# Altium PCB B222.PcbDoc
Units mm, origin at the board's own origin, x right, y up, seen from the top; angles counter-clockwise.
Board outline 40 x 22 mm, 4 copper layers (Top Copper, Signal Layer 1, Signal Layer 2, Bottom Copper), stack 1.57 mm thick; 17 components, 21 nets, 108 pads, 302 vias.
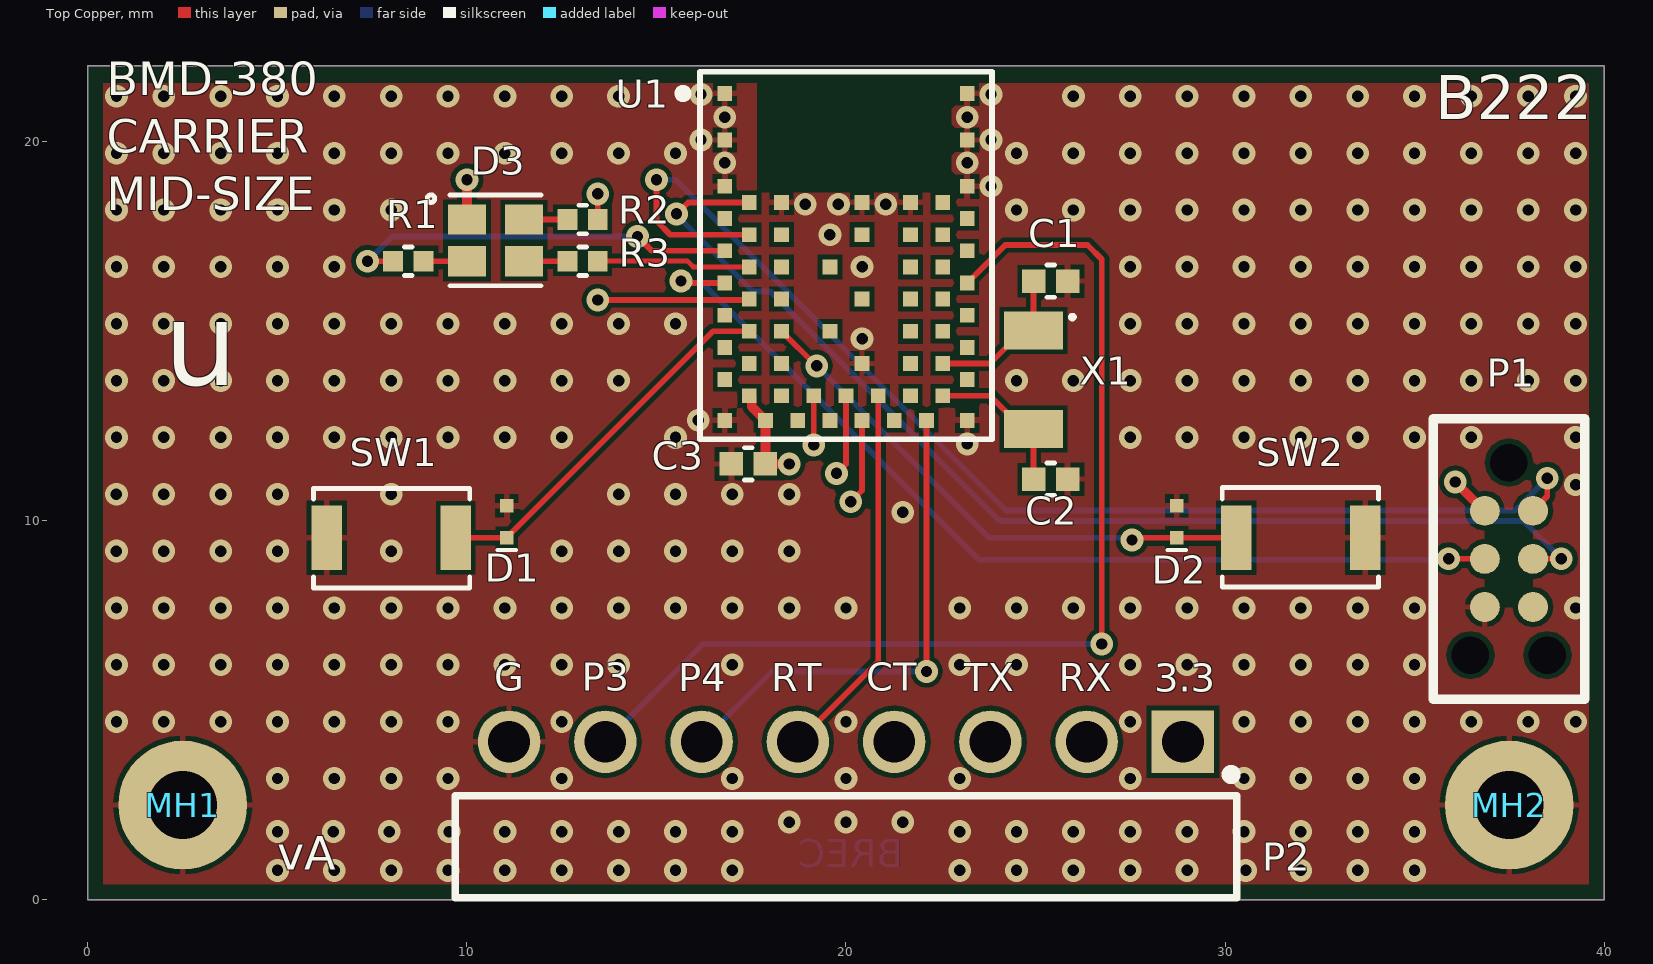
[diagram p0: Top Copper view]
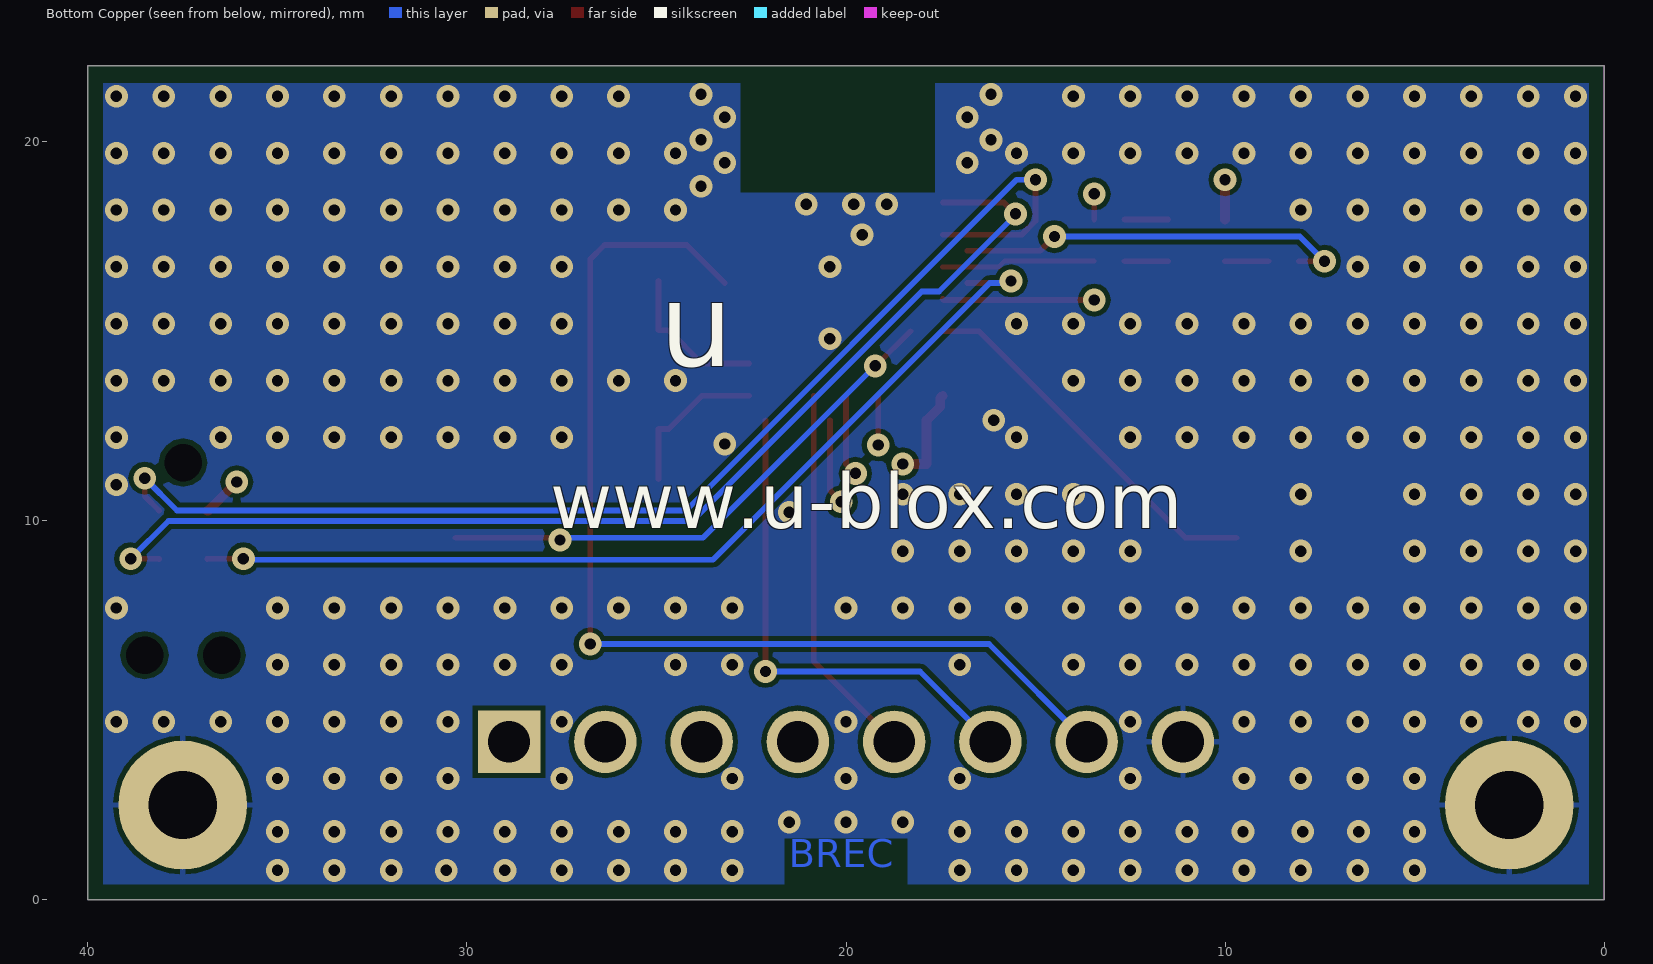
[diagram p1: Bottom Copper view, seen from below]
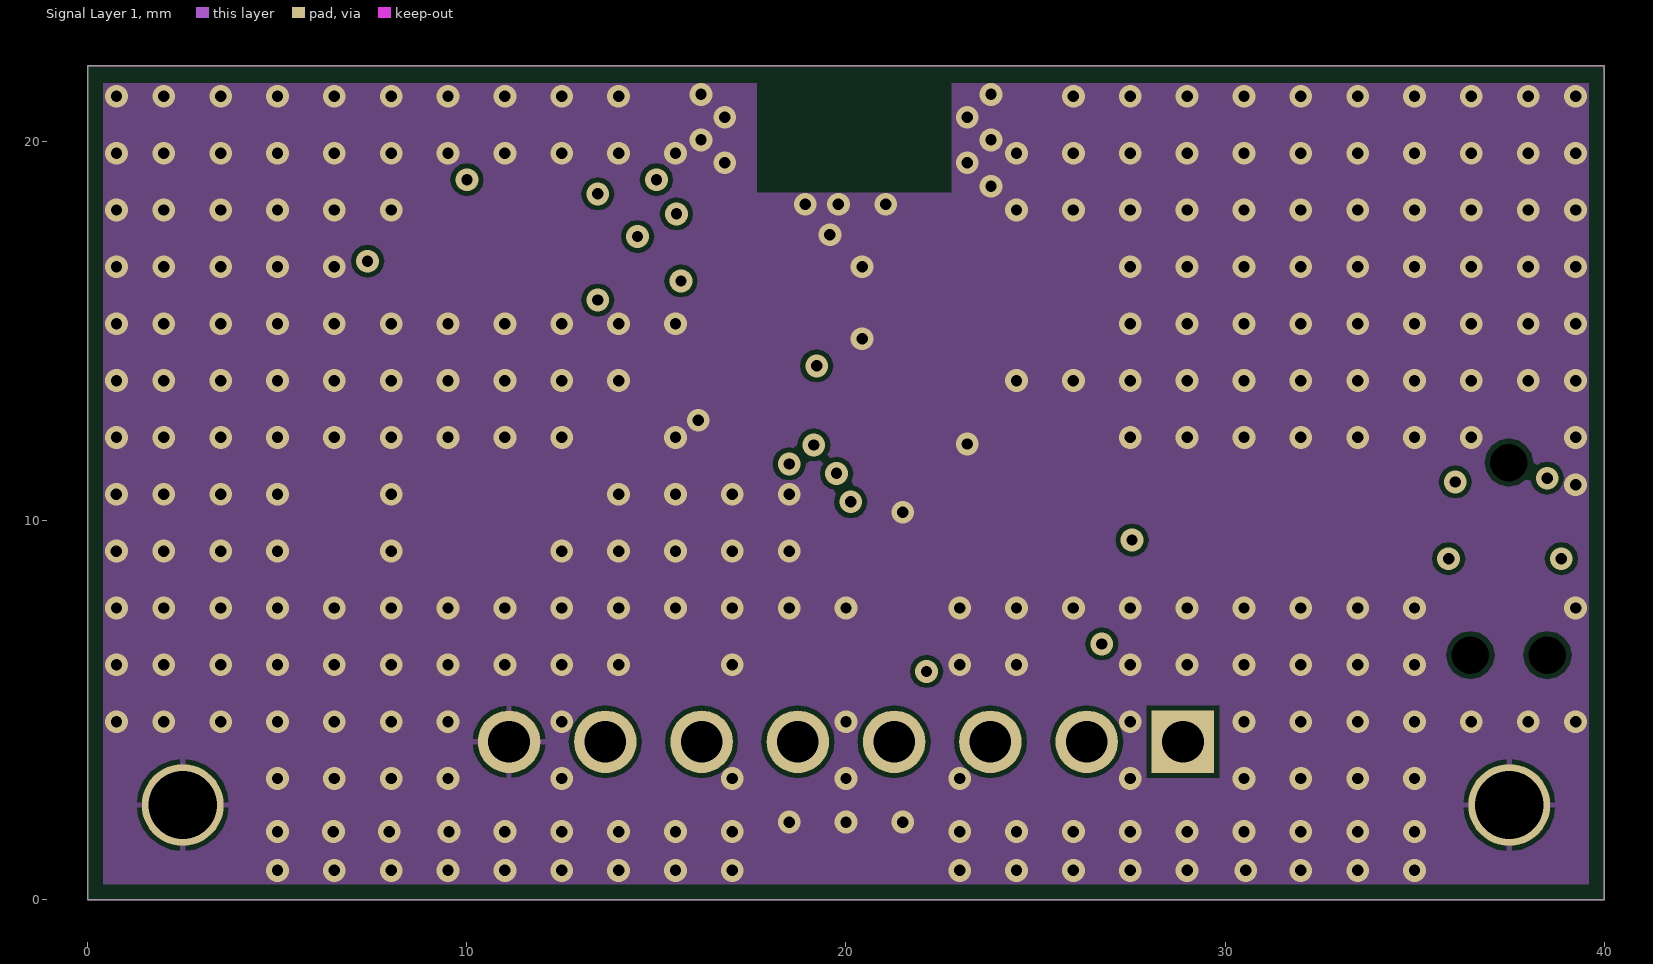
[diagram p2: Signal Layer 1]
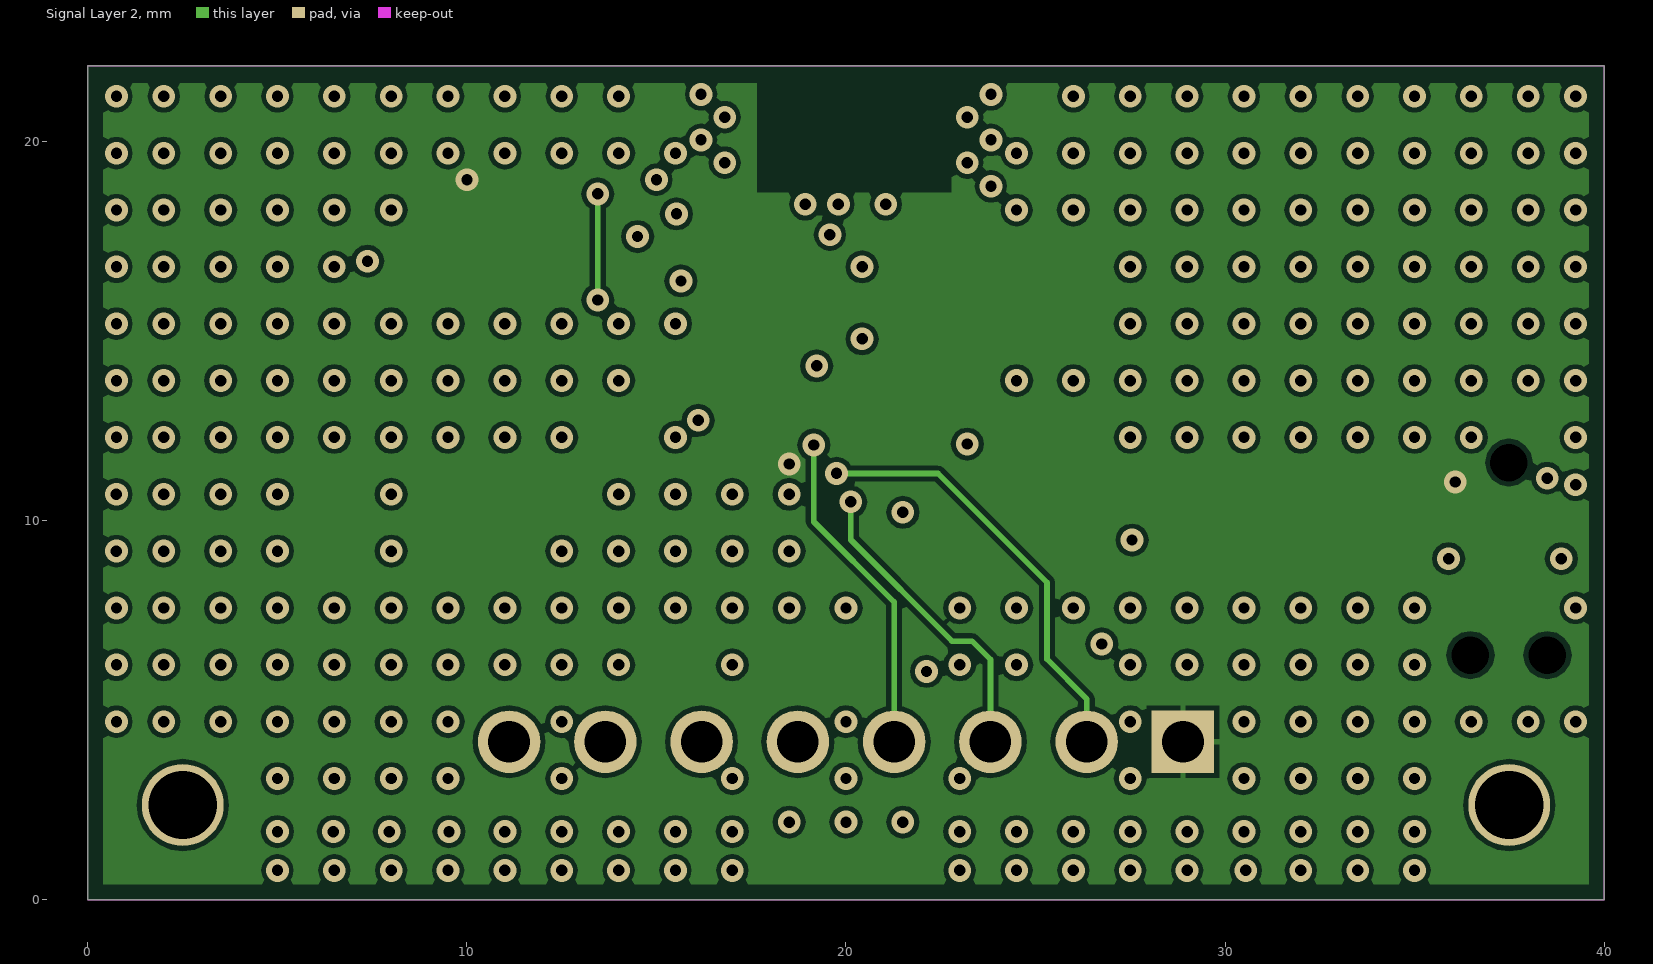
[diagram p3: Signal Layer 2]

## Layer stack, top to bottom
Top Mask: solder mask 0.015, Solder Resist, Dk 3.8
Top Copper: signal copper 0.035
Dielectric 1: prepreg 0.1, 2313, Dk 4.05
Signal Layer 1: signal copper 0.0175
Core: core 1.265, FR-4, Dk 4.5
Signal Layer 2: signal copper 0.0175
Dielectric 2: prepreg 0.1, 2313, Dk 4.05
Bottom Copper: signal copper 0.035
Bottom Mask: solder mask 0.015, Solder Resist, Dk 3.8

## Board outline
0,22 40,22 40,0 0,0

## Design rules (kind name [scope] priority, off if disabled: settings)
BoardOutlineClearance [All] p1: gap=0.4 ignorepadtopadclearanceinfootprint=FALSE
Clearance "Stitching GND" [IsStitchingVia and InNet('GND') vs (IsVia and (Not IsStitchingVia)) Or IsPad] p1: gap=0.127 ignorepadtopadclearanceinfootprint=TRUE
Clearance Clearance_Poly [InPolygon vs OnLayer('Keep-Out Layer') OR (OnLayer('Multi-Layer') AND IsPad  AND Not(PadIsPlated))] p2: gap=0.127 ignorepadtopadclearanceinfootprint=TRUE
Clearance [All] p3: gap=0.127 ignorepadtopadclearanceinfootprint=FALSE except(0: Arc-Text Arc-Hole Track-Text Track-Hole SMDPad-Text SMDPad-Hole THPad-Text THPad-Hole Via-Text Via-Hole Fill-Text Fill-Hole Poly-Text Poly-Hole Region-Text Region-Hole Text-Text Text-Hole)
ComponentClearance [All] p1: gap=0.127 collisioncheckmode=3 verticalgap=0.254 showdistances=FALSE
DiffPairsRouting .14 [All] p1: maxlimit=0.254 minlimit=0.1 mostfreqgap=0.254 toplayer_maxgap=0.1 toplayer_prefgap=0.1 toplayer_minwidth=0.1 toplayer_maxwidth=0.1 toplayer_prefwidth=0.1 midlayer1_mingap=0.254 midlayer1_minwidth=0.381 midlayer1_maxwidth=0.381 midlayer1_prefwidth=0.381 midlayer2_mingap=0.254 midlayer2_minwidth=0.381 midlayer2_maxwidth=0.381 midlayer2_prefwidth=0.381 bottomlayer_maxgap=0.1 bottomlayer_prefgap=0.1 bottomlayer_minwidth=0.1 bottomlayer_maxwidth=0.1 bottomlayer_prefwidth=0.1 maxuncoupledlength=12.7
Height [All] p1: minheight=0 maxheight=25.4 prefheight=2.54
HoleSize [All] p1: absolutevalues=TRUE maxlimit=2540 minlimit=0.127 maxpercent=80.000 minpercent=20.000
HoleToHoleClearance [All] p1: gap=0.152 allowstackedmicrovias=TRUE
MinimumSolderMaskSliver [All] p1: minsoldermaskwidth=0.025
PlaneClearance [InPoly] p1: clearance=0.254
PlaneConnect [All] p1: pad.planeconnectstyle=Relief pad.reliefexpansion=0.508 pad.reliefentries=4 pad.reliefconductorwidth=0.254 pad.reliefairgap=0.254 via.planeconnectstyle=Direct via.reliefexpansion=0.508 via.reliefentries=4 via.reliefconductorwidth=0.254 via.reliefairgap=0.254
PolygonConnect ThermalVias [IsVia] p1: connectstyle=Direct reliefconductorwidth=0.254 reliefentries=4 polygonreliefangle="90 Angle" airgapwidth=0.254
PolygonConnect "PolygonConnect - Power" [InNetClass('')] p2: connectstyle=Relief reliefconductorwidth=0.254 reliefentries=4 polygonreliefangle="90 Angle" airgapwidth=0.127
PolygonConnect PolygonConnect-BGA [InComponentClass('')] p3: connectstyle=Relief reliefconductorwidth=0.152 reliefentries=4 polygonreliefangle="45 Angle" airgapwidth=0.152
PolygonConnect PolygonConnect-General [All] p4: connectstyle=Relief reliefconductorwidth=0.152 reliefentries=4 polygonreliefangle="90 Angle" airgapwidth=0.127
RoutingVias [All] p1: holewidth=0.3 width=0.6 viastyle="Through Hole" minholewidth=0.2 minwidth=0.5 maxholewidth=7 maxwidth=1
SMDEntry [All] p1 off: side=TRUE corner=TRUE anyangle=TRUE
SilkToBoardRegionClearance [All] p1 off:
SilkToSilkClearance [All] p1 off: silktosilkclearance=0.025
SilkToSolderMaskClearance [IsPad] p1 off: minsilkscreentomaskgap=0 clearancetoexposedcopper=TRUE
SolderMaskExpansion SolderMaskExpansion_via [IsVia] p1: expansion=-0.254 istentingtop=TRUE
SolderMaskExpansion [All] p2: expansion=0.05 istentingtop=FALSE
UnRoutedNet [All] p1: checkbadconnections=TRUE
ViasUnderSMD [All] p1: allowed=FALSE
Width [All] p1: maxlimit=2.54 minlimit=0.127 preferedwidth=0.152 toplayer_maxwidth=0.254 toplayer_prefwidth=0.152 bottomlayer_maxwidth=0.254 bottomlayer_prefwidth=0.152 minimp=50.000000 maximp=50.000000 favimp=50.000000
Width Width_1 [All] p2: maxlimit=0.254 minlimit=0.254 preferedwidth=0.254
18 further rules are at their usual default settings.

## Components (designator, comment, footprint, x,y, rotation, side; value= is the part's Value field where it differs from the comment)
C1 "UBXH01-000411410P" "Cap 0402" 25.4,16.325 r0 top value=10P
C2 "UBXH01-000411410P" "Cap 0402" 25.4,11.1 r0 top value=10P
C3 "UBXH01-2021002100N" "Cap 0402" 17.425,11.5 r180 top value=100N
D1 "110-00019" SOD-923 11.05,9.975 r90 top
D2 "110-00019" SOD-923 28.725,9.975 r90 top
D3 "115-00011" 4-PLCC 10.75,17.4 r180 top
MH1 "MH_M1.5DNP" MH_M1.5 2.5,2.5 r0 top
MH2 "MH_M1.5DNP" MH_M1.5 37.5,2.5 r0 top
P1 "TC2030-IDC-NLDNP" TC2030-IDC-NL 37.49,11.535 r270 top
P2 "61300811021" 61300811021 20,1.4 r0 top
R1 "180-00031499R" "RES 0402 HD" 8.45,16.85 r0 top value=499R
R2 "180-00098220R" "RES 0402 HD" 13.05,17.95 r180 top value=220R
R3 "180-00098220R" "RES 0402 HD" 13.05,16.85 r180 top value=220R
SW1 "135-00007" B3U-1000P 8,9.55 r180 top
SW2 "135-00007" B3U-1000P 32,9.55 r0 top
U1 "=Value" BMD_LGA63S_950X750X150_CHIP 20,17 r0 top
X1 "100-00005" XTAL_3215 24.95,13.725 r270 top

## Footprints (in the part's own frame and the unit in brackets; to place one, negate y for a bottom-side part, rotate by r counter-clockwise, add the part's x,y. Pads: shape width x height; smd on the part's side, far side on the other; paste and mask are expansions set on the pad)
4-PLCC [mm] "4 Pin Plastic Leaded Chip Carrier, 2mm x 2mm"
  rect 1x0.8 smd: 1(0.75,-0.55) 2(-0.75,-0.55) 3(-0.75,0.55) 4(0.75,0.55)
  silkscreen extent -1.2,-1.2 1.8,1.2, body extent -1.05,-1.05 1.05,1.05, height 1.01
61300811021 [mm]
  rect 1.65x1.65 hole 1.1: 1(8.89,2.77)
  round 1.65 hole 1.1: 2(6.35,2.77) 3(3.81,2.77) 4(1.27,2.77) 5(-1.27,2.77) 6(-3.81,2.77) 7(-6.35,2.77) 8(-8.89,2.77)
  silkscreen extent -10.31,-1.35 10.31,2.03, body extent -10.16,-7.27 10.16,3.09, height 2.58
B3U-1000P [mm] "Button Tactile, SMT 4mm x 2.5mm, height 1.2mm"
  rect 0.8x1.7 smd: 1(-1.7,0) 2(1.7,0)
  silkscreen extent -2.07,-1.3 2.05,1.33, body extent -2,-1.25 2,1.25, height 1.6
BMD_LGA63S_950X750X150_CHIP [mm] "WLCSP, 63pin, 0.85mm Pitch, 9.5mm x 7.5mm"
  rect 0.39x0.39 smd: 1(-3.2,4.275) 2(-3.2,3.05) 3(-3.2,1.825) 4(-2.55,1.4) 5(-1.7,1.4) 6(-3.2,0.975) 7(-2.55,0.55) 8(-1.7,0.55) 9(-3.2,0.125) 10(-2.55,-0.3) 11(-1.7,-0.3) 12(-3.2,-0.725) 13(-2.55,-1.15) 14(-1.7,-1.15) 15(-3.2,-1.575) 16(-2.55,-2) 17(-1.7,-2) 18(-3.2,-2.425) 19(-2.55,-2.85) 20(-1.7,-2.85) 21(-3.2,-3.275) 22(-2.55,-3.7) 23(-3.2,-4.35) 24(-2.125,-4.35) 25(-1.7,-3.7) 26(-1.275,-4.35) 27(-0.85,-3.7) 28(-0.425,-4.35) 29(0,-3.7) 30(0.425,-4.35) 31(0.85,-3.7) 32(1.275,-4.35) 33(1.7,-3.7) 34(2.125,-4.35) 35(3.2,-4.35) 36(2.55,-3.7) 37(3.2,-3.275) 38(2.55,-2.85) 39(1.7,-2.85) 40(3.2,-2.425) 41(2.55,-2) 42(1.7,-2) 43(3.2,-1.575) 44(2.55,-1.15) 45(1.7,-1.15) 46(3.2,-0.725) 47(2.55,-0.3) 48(1.7,-0.3) 49(3.2,0.125) 50(2.55,0.55) 51(1.7,0.55) 52(3.2,0.975) 53(2.55,1.4) 54(1.7,1.4) 55(3.2,1.825) 56(3.2,3.05) 57(3.2,4.275) 58(0.425,1.4) 59(0.425,0.55) 60(-0.425,-0.3) 61(0.425,-1.15) 62(-0.425,-2) 63(0.425,-2.85)
  Multi-Layer pour cut-out: -3.75,4.75 -3.75,4.55 -2.36,4.55 -2.36,1.65 2.79,1.65 2.79,4.55 3.75,4.55 3.75,4.75
  silkscreen extent -4.4,-4.85 3.85,4.85, body extent -3.75,-4.75 3.75,4.75, height 1.53
"Cap 0402" [mm] "Chip Capacitor, 2-Leads, Body 1.00x0.50mm, IPC Medium Density"
  rect 0.62x0.62 smd: 1(-0.45,0) 2(0.45,0)
  silkscreen extent -0.1,-0.43 0.1,0.43, body extent -0.55,-0.3 0.55,0.3, height 0.6
MH_M1.5 [mm] "Mounting Hole M1.5 Metric, 3.4mm diameter pad"
  round 3.4 / inner round 2.159 / far side round 3.4 hole 1.8: 1(0,0)
"RES 0402 HD" [mm] "Chip Resistor, 2-Leads, Body 1.05x0.54mm, IPC High Density"
  rect 0.52x0.55 smd: 1(-0.4,0) 2(0.4,0)
  silkscreen extent -0.1,-0.38 0.1,0.38, body extent -0.55,-0.3 0.55,0.3, height 0.4
SOD-923 [mm] "SOD-923, 2-Leads, Body 1.25x2.50mm, IPC High Density,"
  rect 0.36x0.35 smd mask+0.05: 1(-0.42,0) 2(0.42,0)
  silkscreen extent -0.75,-0.25 -0.75,0.25, body extent -0.4,-0.3 0.4,0.3, height 0.4
TC2030-IDC-NL [mm] "Tag-Connect 6-Pin No Legs"
  round 0.9 hole 0.995 unplated: 0(0,0) 0(5.08,-1.016) 0(5.08,1.016)
  round 0.79 smd paste-0.39: 1(1.27,-0.635) 2(1.27,0.635) 3(2.54,-0.635) 4(2.54,0.635) 5(3.81,-0.635) 6(3.81,0.635)
  silkscreen extent -1.16,-2 6.24,2
XTAL_3215 [mm] "XTAL, 2-Leads, Body 1.50x3.20mm"
  rect 1x1.55 smd: 1(-1.3,0) 2(1.3,0)
  silkscreen extent -1.7,0.98 -1.6,1.07, body extent -1.65,-0.8 1.65,0.8, height 0.9

## Part data
C1 C2: library part UBXH01-0004114, "CAP CER COG 0402", Manufacturer="Murata Manufacturing Company, Ltd.", Manufacturer 2=None, Manufacturer P/N=GRM1555C1H100CZ01, Max Voltage=25.0V, Tolerance=5%, Automotive=None, Critical=None, Editor=martin.frauchiger, Env=ROHS, Manufacturer 3=None, Manufacturer P/N 2=None, Manufacturer P/N 3=None, Max Current=None, Max Operating Temp=None, Max Power=None, Mfg P/N Datasheet=None, Mfg P/N Datasheet 2=None, Mfg P/N Datasheet 3=None, Mfg P/N Released=Yes, Mfg P/N Released 2=None, Mfg P/N Released 3=None, Mfg P/N Split=0, Mfg P/N Split 2=None, Mfg P/N Split 3=None, Mfg P/N Status=Obsolete, Mfg P/N Status 2=None, Mfg P/N Status 3=None, Min Operating Temp=None, Part Number=UBXH01-0004114, Part Type=Capacitor, Perferred=PREF, Permitted Use="Volume Products", RefDes=C, Release Data="2005-09-01 15:36:53", Released by=martin.frauchiger, Single Source=None, Size=0x0y, UBX Wiki=https://wiki.u-blox.com/bin/view/Operations/PartDetails?index=5225
C3: library part UBXH01-2021002, "CAP CER X5R 0402", Manufacturer="Samsung Electro-Mechanics", Manufacturer 2=None, Manufacturer P/N=CL05A104KP5NNN, Max Voltage=10.0V, Tolerance=10%, Automotive=None, Critical=None, Editor=roland.rust, Env=GREEN, Manufacturer 3=None, Manufacturer P/N 2=None, Manufacturer P/N 3=None, Max Current=None, Max Operating Temp=None, Max Power=None, Mfg P/N Datasheet=https://wiki.u-blox.com/bin/view/Generic/Docs/DocumentSummary?index=28113, Mfg P/N Datasheet 2=None, Mfg P/N Datasheet 3=None, Mfg P/N Released=Yes, Mfg P/N Released 2=None, Mfg P/N Released 3=None, Mfg P/N Split=0, Mfg P/N Split 2=None, Mfg P/N Split 3=None, Mfg P/N Status=Active, Mfg P/N Status 2=None, Mfg P/N Status 3=None, Min Operating Temp=None, Part Number=UBXH01-2021002, Part Type=Capacitor, Perferred=PREF, Permitted Use="Volume Products", RefDes=C, Release Data="2005-07-22 13:59:44", Released by=roland.rust, Single Source=None, Size=0x0y, UBX Wiki=https://wiki.u-blox.com/bin/view/Operations/PartDetails?index=5759
D1 D2: "Diode, ESD9B, 3.3V, ST5G, SOD-923", Manufacturer="ON Semiconductor", Manufacturer P/N=ESD9B3.3ST5G, MFG Package=SOD-923, Package Type=SOD, Part Name="Diode TVS 3.3V SOD-923", Voltage=3.3V, Arena Link=https://app.bom.com/a/4M5DJQ9Q9SR7DV4H?v=spec.summary, Body Size="0.8mm x 0.6mm", Component Mounting Type=SMT, Diode Type=TVS, Height=0.4mm, Item_Phase=Production, Part Number=110-00019, Part_Type=Diode, Pins=2, Revision=0A, Supplier 1=Arrow, Supplier Part Number 1=ESD9B3.3ST5G, Use in new designs=Yes
D3: "LED, RGB Diffused SMT, PLCC4 4 Pin", Color=RGB, Current="20mA Red, 10mA Green, 10mA, Blue", Manufacturer="Cree, Inc.", Manufacturer P/N=CLMVB-FKA-CFHEHLCBB7a363, MFG Package=PLCC4, Package Type=Custom, Part Name="LED RGB SMT 2mm x 2mm", Supplier Part Number 1=941-CLMVBFKACFHEHLCB, Voltage=5V, Arena Link=https://app.bom.com/a/UCV39GZGZIHY581D?v=spec.summary, Body Size="2.0mm x 2.0mm", Component Mounting Type=SMT, Height=1mm, Item_Phase=Production, Mounting Type=Vertical, Number of Circuits=3, Part Number=115-00011, Part_Type=LED, Pins=4, Revision=0A, Supplier 1=Mouser, Use in new designs=Yes, Vf="2V Red, 3V Green, 3V Blue"
MH1 MH2: library part MH_M1.5, "1.5M screw mounting hole, plated", Added By="Jeremy D", Added Date=7/9/2015, DNP=DNP, Height=0mm, Part Number=MH_M1.5, Size="3.4mm x 3.4mm", Type="Mounting Hole"
P1: library part TC2030-IDC-NL, "CON PADS FOR CBL PLUG-OF-NAILS 6-PIN NO LEGS", Manufacturer="TAG Connect", Added By="Paul B", Added Date=4/22/2015, DNP=DNP, Height=0, Manufacturer P/N=TC2030-IDC-NL, Part Number=TC2030-IDC-NL, Size="6.731mm x 12.446mm"
P2: library part CMP-1502-01075-1, "THT Angled Pin Header WR-PHD, Pitch 2.54 mm, Single Row, 8 pins", Contact Resistance=20mOhm, Manufacturer="Wurth Electronics", Operating Temperature=-40to105degC, Rated Current=3A, Withstanding Voltage=500VAC, Working Voltage=250VAC, Datasheet URL=https://katalog.we-online.de/em/datasheet/6130xx11021.pdf, Gender=Male, Manufacturer Part Number=61300811021, Manufacturer URL=http://www.we-online.de, Mounting Technology=THT, Orientation=Angled, Package Reference=61300811021, Packaging=Bag, Part Number=61300811021, Pin Number=8, Pitch=2.54mm, Publisher=WurthElektronik, Row Number=Single
R1: library part 180-00031, "Resistor, 499ohm, 1%, 1/16W, 0402", Manufacturer="Rohm Semiconductor", Manufacturer 2="Samsung Electro-Mechanics America, Inc", Manufacturer P/N=MCR01MRTF4990, Manufacturer P/N 2=RC1005F4990CS, Part Name="RES SMD 499 OHM 1% 1/16W 0402", Power=1/16W, Supplier Part Number 1=RHM499CDCT-ND, Tolerance="+/- 1%", Alternate Footprint Ref="RES 0402", Arena Link=https://app.bom.com/a/Q8RZ5CVCVEDU1SS5?v=spec.summary, Component Mounting Type=SMT, Height=0.4mm, Item_Phase=Production, Part Number=180-00031, Part_Type=Resistor, Pins=2, Revision=0D, Size=0402, Supplier 1=Digi-Key, Supplier 2=Digi-Key, Supplier Part Number 2=1276-3992-1-ND, Use in new designs=Yes
R2 R3: library part 180-00098, "Resistor, 220ohm, 5%, 1/16W, 0402.", Manufacturer="Panasonic Electronic Components", Manufacturer 2="Samsung Electro-Mechanics America, Inc", Manufacturer P/N=ERJ-2GEJ221X, Manufacturer P/N 2=RC1005J221CS, Part Name="RES SMD 220 OHM 5% 1/16W 0402", Power=1/16W, Supplier Part Number 1=P220JCT-ND, Tolerance="+/- 5%", Alternate Footprint Ref="RES 0402", Arena Link=https://app.bom.com/a/8Q9HNUDUDWVBJC30?v=spec.summary, Component Mounting Type=SMT, Height=0.4mm, Item_Phase=Production, Part Number=180-00098, Part_Type=Resistor, Pins=2, Revision=0C, Size=0402, Supplier 1=Digi-Key, Supplier 2=Digi-Key, Supplier Part Number 2=1276-4360-1-ND, Use in new designs=Yes
SW1 SW2: "Button, Momentary SPST-NO, 0.05A, 12V, 3mm x 2.5mm", Current=50mA, Manufacturer="Omron Electronics Inc-EMC Div", Manufacturer P/N=B3U-1000P, Part Name="SWITCH TACTILE SPST-NO 0.05A 12V", Supplier Part Number 1=SW1020CT-ND, Voltage=12VDC, Arena Link=https://app.bom.com/a/TBU28FYFYHGV5FQ0?v=spec.summary, Body Size="3mm x 2.5mm", Component Mounting Type=SMT, Height=1.2mm, Item_Phase=Production, Part Number=135-00007, Part_Type=Button, Pins=2, Revision=0A, Supplier 1=Digi-Key, Switch/Button Circuit=SPST, Switch/Button Function=Off-Mom, Use in new designs=Yes
U1: library part BMD-380, "u-blox BMD-380 Bluetooth 5 LE, 802.15.4 module", Manufacturer=u-blox, Manufacturer P/N=BMD-380-A-R, Body Size="9.5mm x 7.5mm", Height=1.5mm, Internal Antenna=Yes, Part Number=BMD-380, Protocol="BT 5.1 LE, 802.15.4, 2.4GHz Proprietary"
X1: "XTAL, 2Pin, 32.768kHz, 7pF 20ppm", Frequency=32.768kHz, Frequency Tolerance=20ppm, Manufacturer=Epson, Manufacturer 2="AVX Corporation", Manufacturer P/N="FC-135 32.7680KA-AG3", Manufacturer P/N 2=ST3215SB32768C0HPWBB, MFG Package=2-SMD, Part Name="XTAL 32.768kHz 7pF 20ppm 3215", Supplier Part Number 1=SER4086CT-ND, Arena Link=https://app.bom.com/a/L3MU07Q7Q98O5PC8?v=spec.summary, Body Size="3.2mm x 1.5mm", CL=7pF, Component Mounting Type=SMT, Height=0.9mm, Item_Phase=Production, Part Number=100-00005, Part_Type=Crystal/Oscillator, Pins=2, Revision=0C, Supplier 1=Digi-Key, Supplier 2=Digi-Key, Supplier Part Number 2=1253-1113-1-ND, Use in new designs=Yes

## Via types
v1: diameter 0.6, hole 0.3, Top Copper to Bottom Copper, tented both sides, 302 vias

## Nets (pads, with @x,y where several pads share a name; then routed paths per layer and width w, separated by ;. In a path a pad name is that pad's centre, name@x,y a point inside that pad or via, vN(x,y) a via of type N, cw(c..) or ccw(c..) an arc to the next point about the centre after c; other vN are vias at no path point)
3V3: C3.1 D3.1 P1.1 P2.1 U1.22 U1.24 | length 4.7
  Top Copper w0.254: D3.1 v1(10,19) ; U1.22 17.511,13.239 17.511,13.014 U1.24 C3.1 v1(18.5,11.5) ; v1(36.075,11.025) 36.835,10.265 P1.1
BLUE: R2.1 U1.13 | length 7.5
  Top Copper w0.152: v1(13.45,15.825) 17.425,15.825 U1.13 ; R2.1 v1(13.45,18.625)
  Signal Layer 2 w0.152: v1(13.45,15.825) v1(13.45,18.625)
BUTTON_1: D1.1 SW1.1 U1.16 | length 10
  Top Copper w0.152: SW1.1 9.705,9.555 D1.1 11.05,9.56 16.49,15 U1.16
BUTTON_2: D2.1 SW2.1 U1.17 | length 14.4
  Top Copper w0.152: U1.17 19.205,14.095 19.205,14.054 19.225,14.074 v1(19.225,14.087) ; v1(27.547,9.493) 27.607,9.553 28.723,9.553 D2.1 30.295,9.555 SW2.1
  Bottom Copper w0.152: v1(19.225,14.087) 19.238,14.087 23.775,9.55 27.49,9.55 v1(27.547,9.493)
CTS: P2.4 U1.27 | length 10
  Top Copper w0.152: v1(19.15,12) U1.27
  Signal Layer 2 w0.152: v1(19.15,12) 19.15,9.975 21.27,7.855 P2.4
GND: C1.2 C2.2 C3.2 D1.2 D2.2 MH1.1 MH2.1 P1.5 P2.8 SW1.2 SW2.2 U1.1 U1.2 U1.3 U1.5 U1.23 U1.35 U1.54 U1.55 U1.56 U1.57 U1.58 U1.63
  other v1: 5,0.775 6.5,0.775 8,0.775 9.5,0.775 11,0.775 12.5,0.775 14,0.775 15.5,0.775 17,0.775 23,0.775 24.5,0.775 26,0.775 27.5,0.775 29,0.775 30.55,0.775 32,0.775 33.5,0.775 35,0.775 5,1.8 6.475,1.8 7.95,1.8 9.525,1.8 11,1.8 12.5,1.8 14,1.8 15.5,1.8 17,1.8 23,1.8 24.5,1.8 26,1.8 27.5,1.8 29,1.8 30.5,1.8 32,1.8 33.5,1.8 35,1.8 18.5,2.05 20,2.05 21.5,2.05 5,3.2 6.5,3.2 8,3.2 9.5,3.2 12.5,3.2 17,3.2 20,3.2 23,3.2 27.5,3.2 30.5,3.2 32,3.2 33.5,3.2 35,3.2 0.752,4.7 2,4.7 3.5,4.7 5,4.7 6.5,4.7 8,4.7 9.5,4.7 12.5,4.7 20,4.7 27.5,4.7 30.5,4.7 32,4.7 33.5,4.7 35,4.7 36.5,4.7 38,4.7 39.25,4.7 0.752,6.2 2,6.2 3.5,6.2 5,6.2 6.5,6.2 8,6.2 9.5,6.2 11,6.2 12.5,6.2 14,6.2 17,6.2 23,6.2 24.5,6.2 27.5,6.2 29,6.2 30.5,6.2 32,6.2 33.5,6.2 35,6.2 0.752,7.7 2,7.7 3.5,7.7 5,7.7 6.5,7.7 8,7.7 9.5,7.7 11,7.7 12.5,7.7 14,7.7 15.5,7.7 17,7.7 18.5,7.7 20,7.7 23,7.7 24.5,7.7 26,7.7 27.5,7.7 29,7.7 30.5,7.7 32,7.7 33.5,7.7 35,7.7 39.25,7.7 0.75,9.2 2,9.2 3.5,9.2 5,9.2 8,9.2 12.5,9.2 14,9.2 15.5,9.2 17,9.2 18.5,9.2 21.5,10.225 0.75,10.7 2,10.7 3.5,10.7 5,10.7 8,10.7 14,10.7 15.5,10.7 17,10.7 18.5,10.7 39.25,10.95 23.2,12.025 0.752,12.2 2,12.2 3.5,12.2 5,12.2 6.5,12.2 8,12.2 9.5,12.2 11,12.2 12.5,12.2 15.5,12.2 27.5,12.2 29,12.2 30.5,12.2 32,12.2 33.5,12.2 35,12.2 36.5,12.2 39.25,12.2 16.1,12.65 0.752,13.7 2,13.7 3.5,13.7 5,13.7 6.5,13.7 8,13.7 9.5,13.7 11,13.7 12.5,13.7 14,13.7 24.5,13.7 26,13.7 27.5,13.7 29,13.7 30.5,13.7 32,13.7 33.5,13.7 35,13.7 36.5,13.7 38,13.7 39.25,13.7 20.425,14.8 0.752,15.2 2,15.2 3.5,15.2 5,15.2 6.5,15.2 8,15.2 9.5,15.2 11,15.2 12.5,15.2 14,15.2 15.5,15.2 27.5,15.2 29,15.2 30.5,15.2 32,15.2 33.5,15.2 35,15.2 36.5,15.2 38,15.2 39.25,15.2 0.752,16.7 2,16.7 3.5,16.7 5,16.7 6.5,16.7 20.425,16.7 27.5,16.7 29,16.7 30.5,16.7 32,16.7 33.5,16.7 35,16.7 36.5,16.7 38,16.7 39.25,16.7 19.575,17.55 0.752,18.2 2,18.2 3.5,18.2 5,18.2 6.5,18.2 8,18.2 24.5,18.2 26,18.2 27.5,18.2 29,18.2 30.5,18.2 32,18.2 33.5,18.2 35,18.2 36.5,18.2 38,18.2 39.25,18.2 18.925,18.35 19.8,18.35 21.05,18.35 23.825,18.825 16.8,19.45 23.2,19.45 0.752,19.7 2,19.7 3.5,19.7 5,19.7 6.5,19.7 8,19.7 9.5,19.7 11,19.7 12.5,19.7 14,19.7 15.5,19.7 24.5,19.7 26,19.7 27.5,19.7 29,19.7 30.5,19.7 32,19.7 33.5,19.7 35,19.7 36.5,19.7 38,19.7 39.25,19.7 16.175,20.05 23.825,20.05 16.8,20.65 23.2,20.65 0.752,21.2 2,21.2 3.5,21.2 5,21.2 6.5,21.2 8,21.2 9.5,21.2 11,21.2 12.5,21.2 14,21.2 26,21.2 27.5,21.2 29,21.2 30.5,21.2 32,21.2 33.5,21.2 35,21.2 36.5,21.2 38,21.2 39.25,21.2 16.175,21.25 23.825,21.25
GREEN: R3.1 U1.10 | length 4.1
  Top Copper w0.127: R3.1 13.458,16.858 15.806,16.858 15.965,16.7 U1.10
LFCLK1: C2.1 U1.36 X1.2 | length 4.1
  Top Copper w0.152: U1.36 23.8,13.3 24.675,12.425 X1.2 C2.1
LFCLK2: C1.1 U1.38 X1.1 | length 4.1
  Top Copper w0.152: U1.38 23.8,14.15 24.675,15.025 X1.1 C1.1
NetD3_2: D3.2 R2.2 | length 1.2
  Top Copper w0.152: D3.2 R2.2
NetD3_3: D3.3 R3.2 | length 1.2
  Top Copper w0.152: D3.3 R3.2
NetD3_4: D3.4 R1.2 | length 1.1
  Top Copper w0.152: R1.2 D3.4
nRESET: P1.3 U1.12 | length 25.4
  Top Copper w0.152: v1(15.645,16.328) 15.698,16.275 U1.12 ; v1(35.9,9) 35.902,8.998 36.853,8.998 P1.3
  Bottom Copper w0.152: v1(15.645,16.328) 15.698,16.275 16.207,16.275 18.811,13.671 23.507,8.975 35.875,8.975 v1(35.9,9)
P0.03: P2.7 U1.46 | length 28.4
  Top Copper w0.152: U1.46 24.2,17.275 26.375,17.275 26.75,16.9 v1(26.75,6.75)
  Bottom Copper w0.152: P2.7 16.23,6.75 v1(26.75,6.75)
P0.04: P2.6 U1.34 | length 13.3
  Top Copper w0.152: v1(22.125,6.025) U1.34
  Bottom Copper w0.152: P2.6 18.045,6.025 v1(22.125,6.025)
RED: R1.1 U1.9 | length 10.5
  Top Copper w0.152: v1(7.375,16.85) R1.1 ; v1(14.5,17.5) 14.875,17.125 U1.9
  Bottom Copper w0.152: v1(7.375,16.85) 8.025,17.5 v1(14.5,17.5)
RTS: P2.5 U1.31 | length 10
  Top Copper w0.152: P2.5 20.85,6.29 U1.31
RXD: P2.2 U1.29 | length 13.5
  Top Copper w0.152: v1(19.75,11.25) 20,11.5 U1.29
  Signal Layer 2 w0.152: v1(19.75,11.25) 22.425,11.25 25.3,8.375 25.3,6.35 26.35,5.3 P2.2
SWCLK: P1.4 U1.4 | length 29.9
  Top Copper w0.152: v1(15.526,18.097) 15.536,18.097 15.839,18.4 U1.4 ; P1.4 38.128,8.998 38.873,8.998 v1(38.875,9)
  Bottom Copper w0.152: v1(15.526,18.097) 15.526,18.067 17.544,16.049 18.001,16.049 24.029,10.021 24.084,10.021 24.109,9.996 37.879,9.996 v1(38.875,9)
SWDIO: P1.2 U1.7 | length 32.2
  Top Copper w0.152: v1(15,19) 15,17.912 15.362,17.55 U1.7 ; P1.2@38.13,10.27 P1.2 38.125,10.27 38.5,10.645 v1(38.5,11.125)
  Bottom Copper w0.152: v1(15,19) 15.5,19 24.225,10.275 37.65,10.275 v1(38.5,11.125)
TXD: P2.3 U1.30 | length 10.4
  Top Copper w0.152: v1(20.125,10.5) 20.425,10.8 U1.30
  Signal Layer 2 w0.152: v1(20.125,10.5) 20.125,9.5 22.8,6.825 23.325,6.825 23.81,6.34 P2.3
pads on no net: P1.0 P1.6 U1.6 U1.8 U1.11 U1.14 U1.15 U1.18 U1.19 U1.20 U1.21 U1.25 U1.26 U1.28 U1.32 U1.33 U1.37 U1.39 U1.40 U1.41 U1.42 U1.43 U1.44 U1.45 U1.47 U1.48 U1.49 U1.50 U1.51 U1.52 U1.53 U1.59 U1.60 U1.61 U1.62

## Polygon pours and split planes (outlines as drawn)
GND on Bottom Copper "GND_L04_P010" (solid, remove dead copper, pour order 10): 40,22 0,22 0,0 40,0
GND on Signal Layer 1 "NONET_L-01_P-001" (solid, remove dead copper, pour order 11): 0,22 40,22 40,0 0,0
3V3 on Signal Layer 2 "NONET_L-01_P-001" (solid, remove dead copper, pour order 14): 0,22 40,22 40,0 0,0
GND on Top Copper "GND_L01_P009" (solid, remove dead copper, pour order 9): 39.876,22.033 -0.124,22.033 -0.124,0.033 39.876,0.033

## Keep-outs
Keep-Out Layer:
  the board outline again, w0.025

## Other copper
Top Copper:
  pour cut-out: 17.64,21.55 0,21.55 0,22 40,22 40,21.55 22.79,21.55 22.79,18.65 17.64,18.65
  pour cut-out: 37.225,10.275 37.75,10.275 38.125,9.9 38.125,8.075 37.775,7.725 37.2,7.725 36.855,8.07 36.855,9.905 36.925,9.975
Signal Layer 1:
  pour cut-out: 17.64,21.55 0,21.55 0,22 40,22 40,21.55 22.79,21.55 22.79,18.65 17.64,18.65
Signal Layer 2:
  pour cut-out: 17.64,21.55 0,21.55 0,22 40,22 40,21.55 22.79,21.55 22.79,18.65 17.64,18.65
Bottom Copper:
  pour cut-out: 17.64,21.55 0,21.55 0,22 40,22 40,21.55 22.79,21.55 22.79,18.65 17.64,18.65
  pour cut-out: 18.375,0.4 18.375,1.625 21.625,1.625 21.625,0.4
  text "BREC" at 21.512,0.614 h1.27

## Silkscreen, mask and mechanical layers (free items; w line width, h text height)
Top Overlay:
  text "B222" at 35.543,20.213 h2
  text "BMD-380 / CARRIER / MID-SIZE" at 0.5,17.9 h1.52
  text "u" at 2.014,12.854 h3.81
  text "G" at 10.724,5.264 h1.27
  text "P3" at 13.026,5.264 h1.27
  text "CT" at 20.534,5.264 h1.27
  text "P4" at 15.577,5.25 h1.27
  text "RT" at 18.025,5.25 h1.27
  text "TX" at 23.117,5.25 h1.27
  text "RX" at 25.611,5.25 h1.27
  text "3.3" at 28.136,5.239 h1.27
  text "vA" at 5,0.5 h1.52
Bottom Overlay:
  text "u" at 24.911,13.348 h3.81
  text "www.u-blox.com" at 27.806,9.309 h2.5
Route Tool Path:
  the board outline again, w0.127